# Altium PCB BlackPill.PcbDoc (part 1 of 2)
Units mm, origin at the board's own origin, x right, y up, seen from the top; angles counter-clockwise.
Board outline 35 x 50 mm, 4 copper layers (Top Layer, Mid Layer 1, Mid Layer 2, Bottom Layer), stack 1.586 mm thick; 44 components, 52 nets, 225 pads, 204 vias.
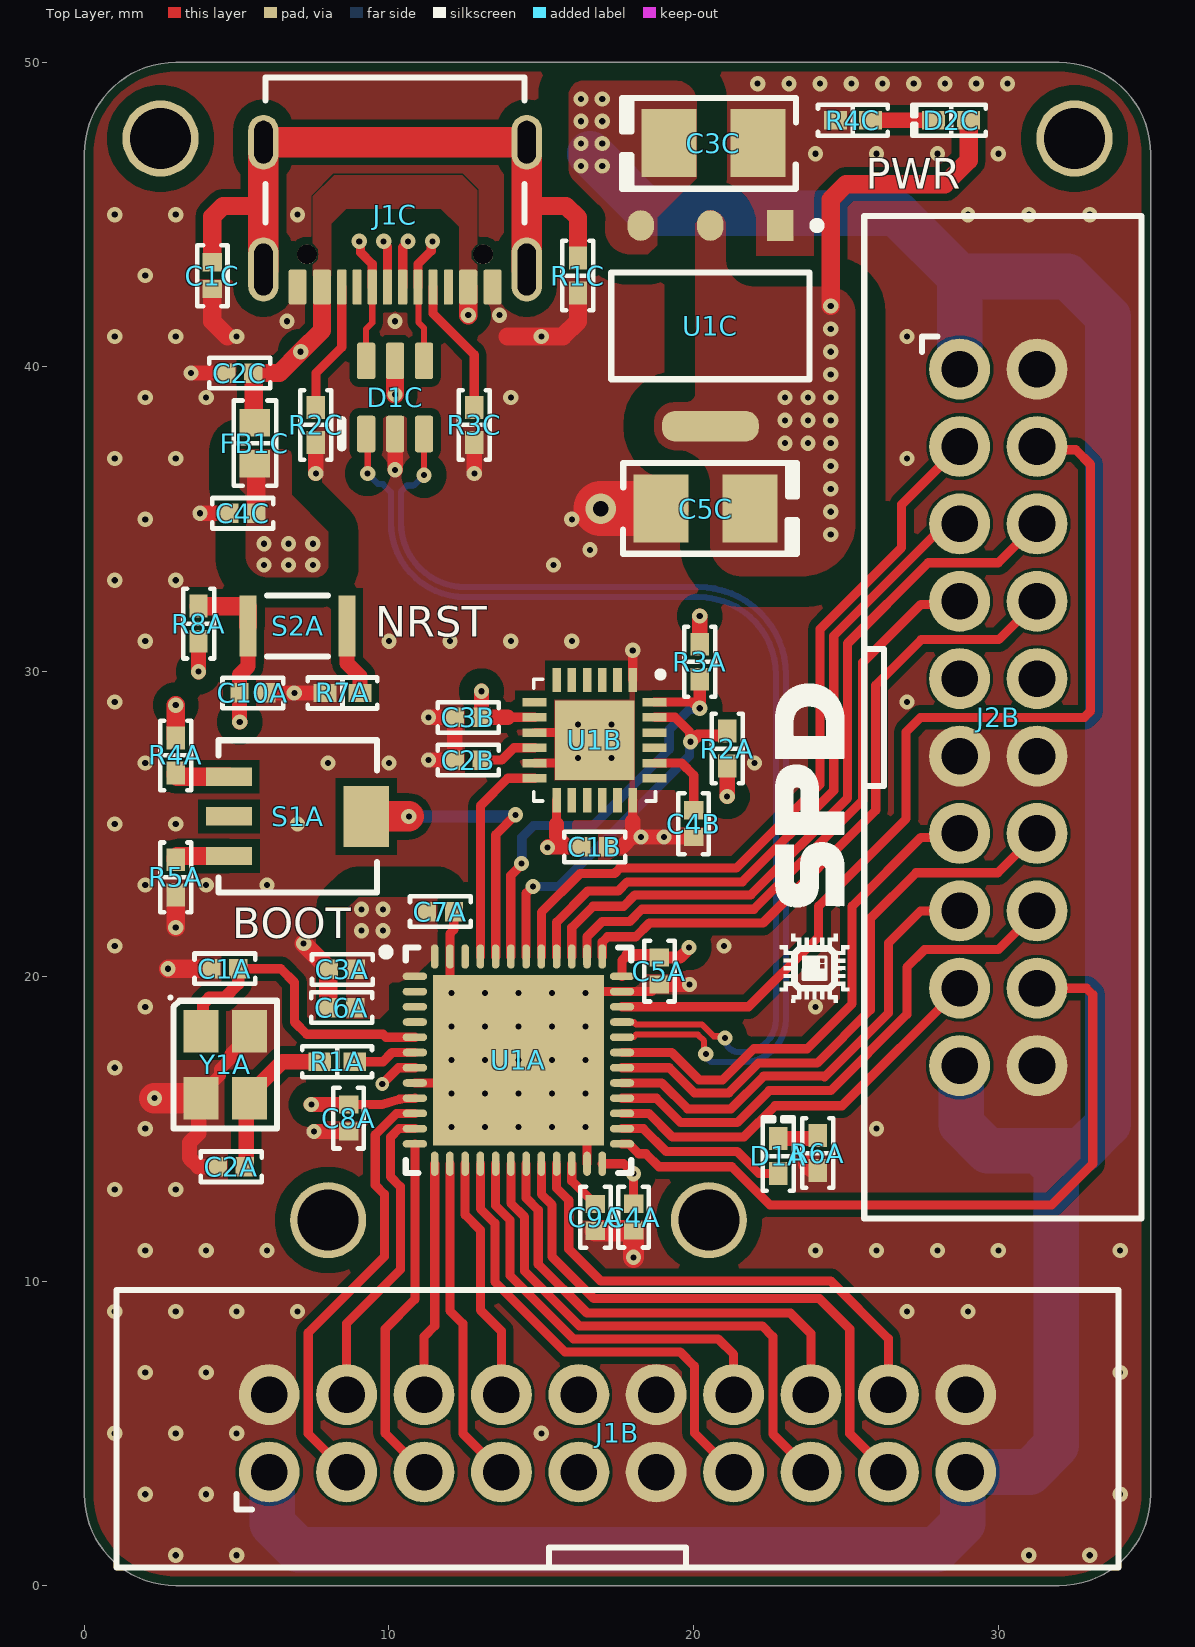
[diagram p0: Top Layer view]
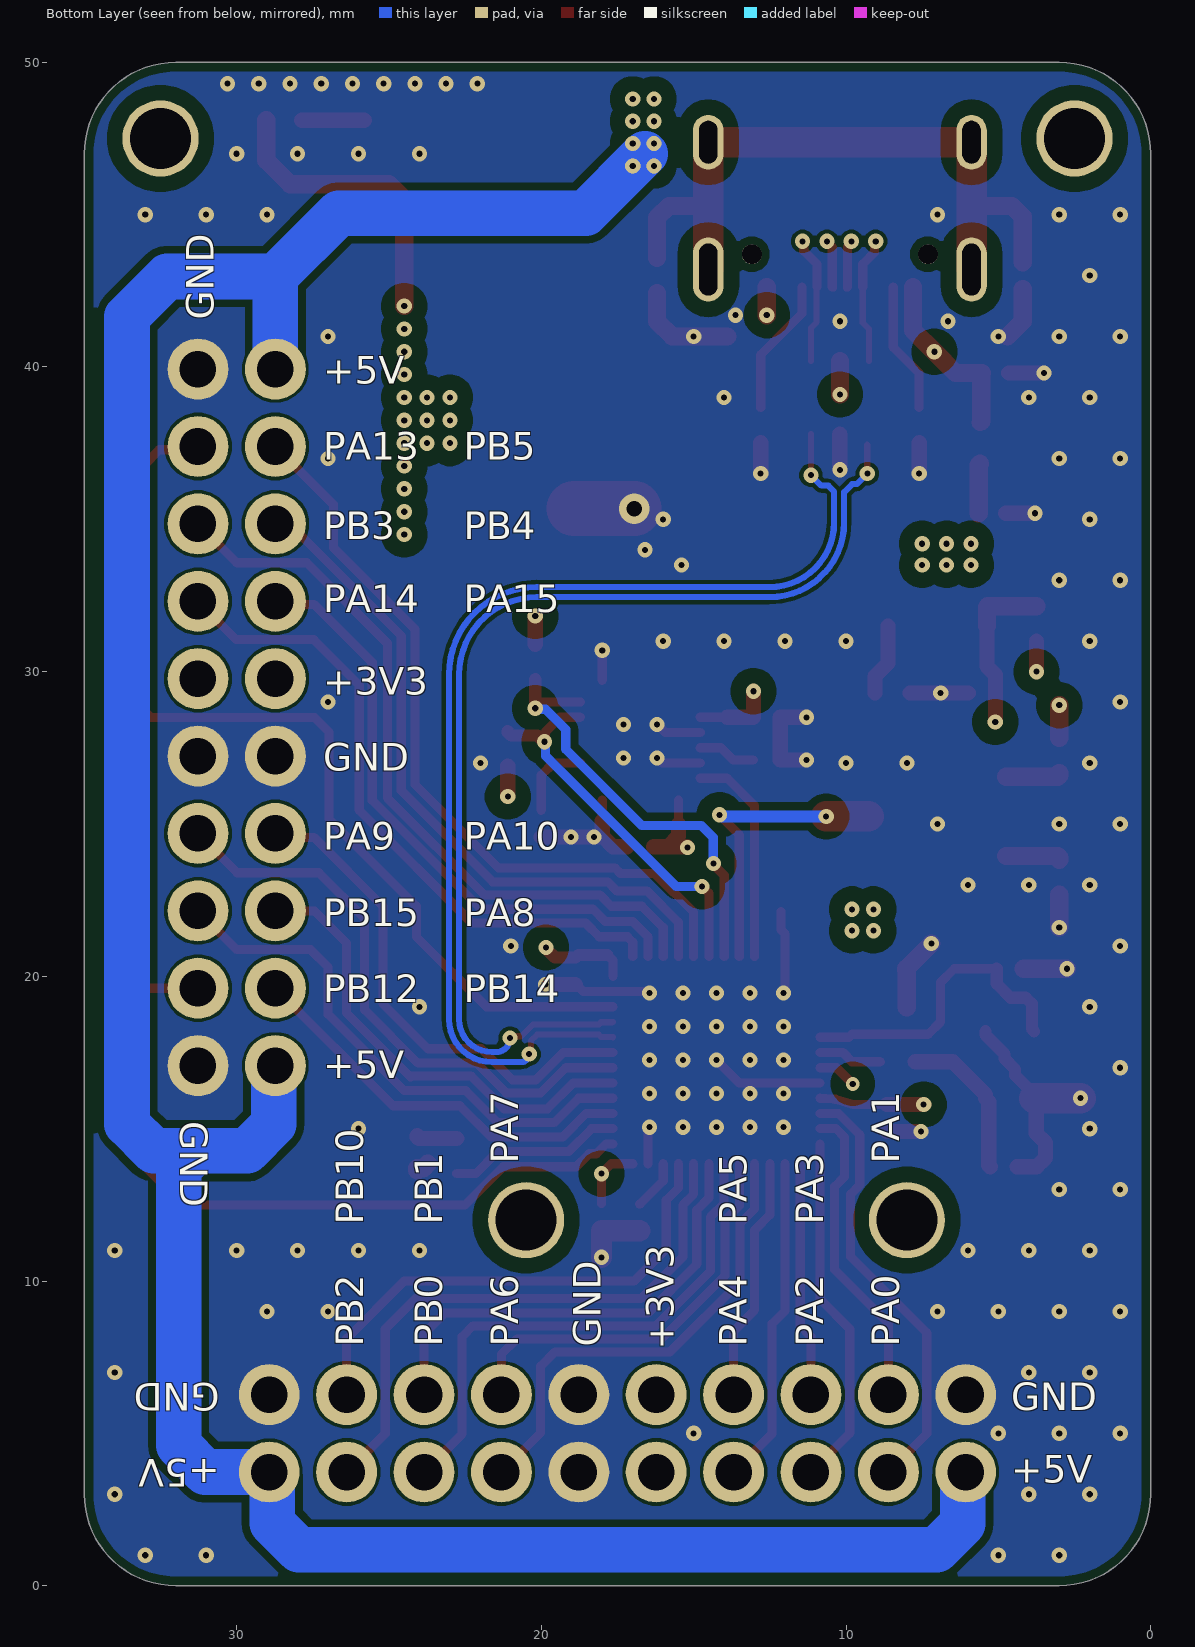
[diagram p1: Bottom Layer view, seen from below]
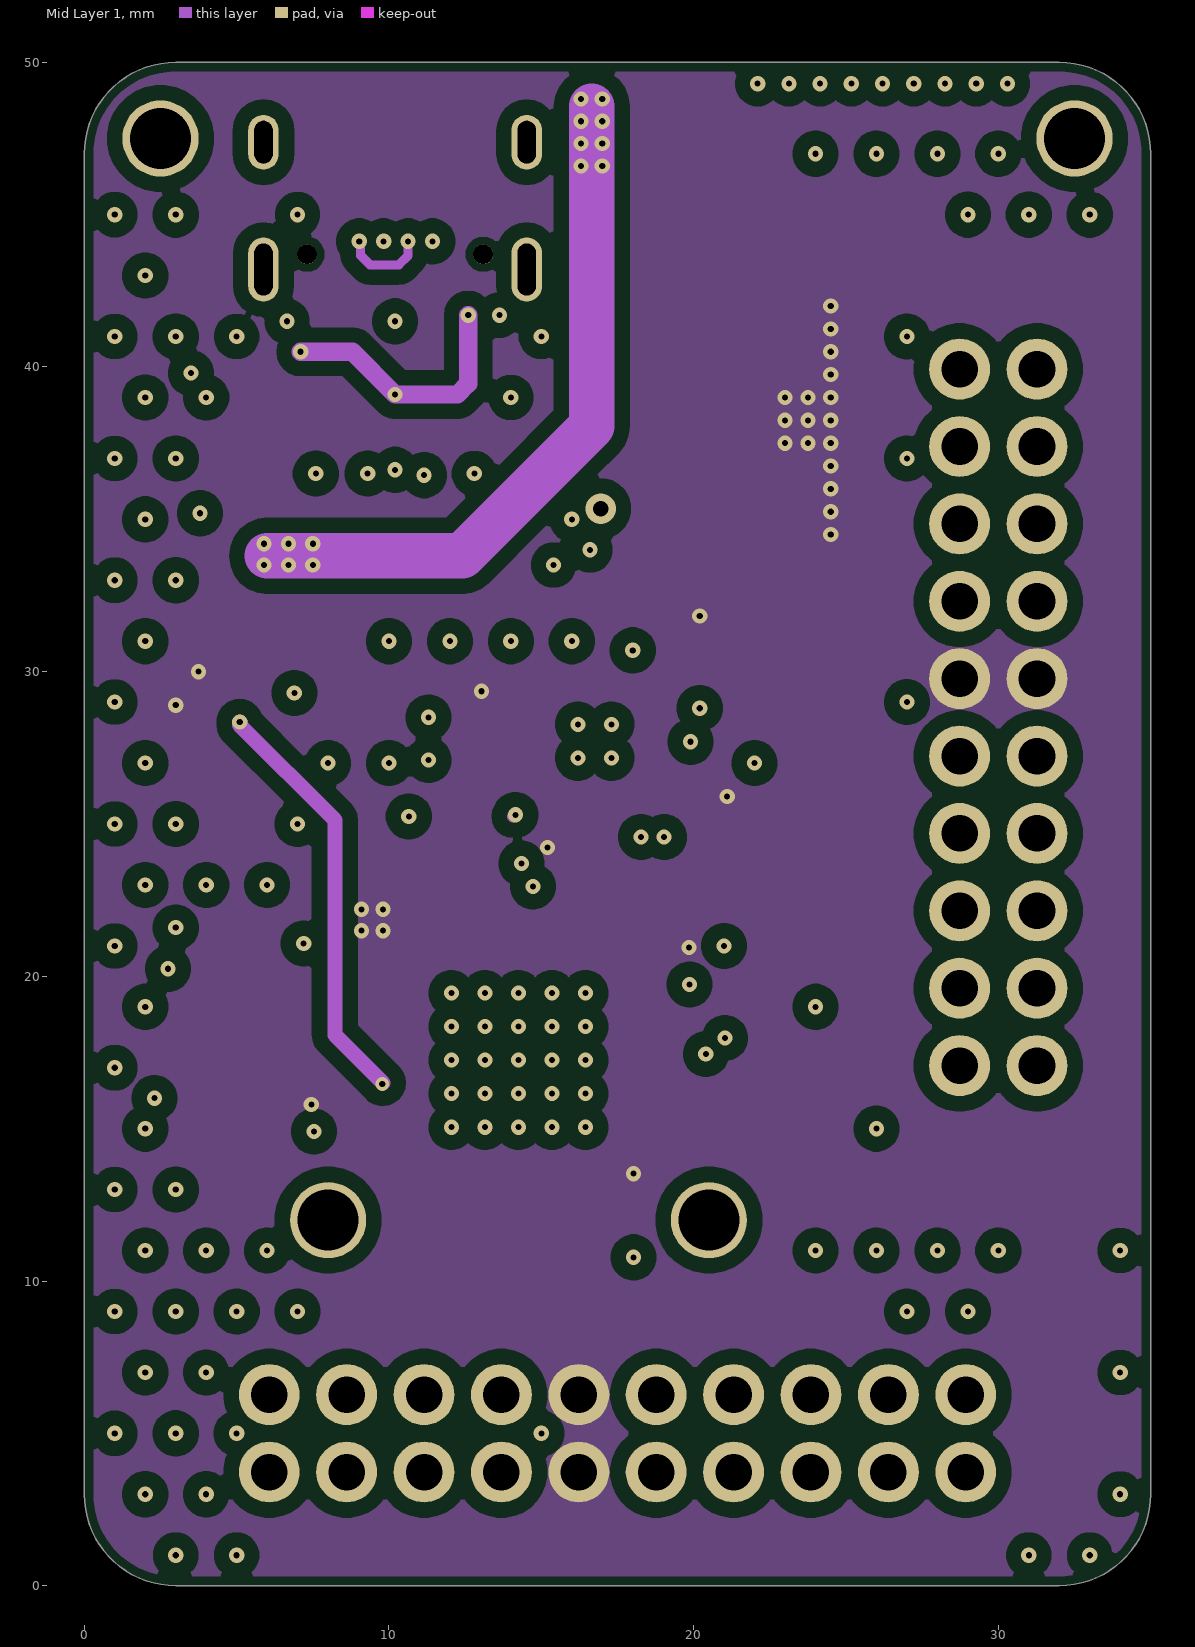
[diagram p2: Mid Layer 1]
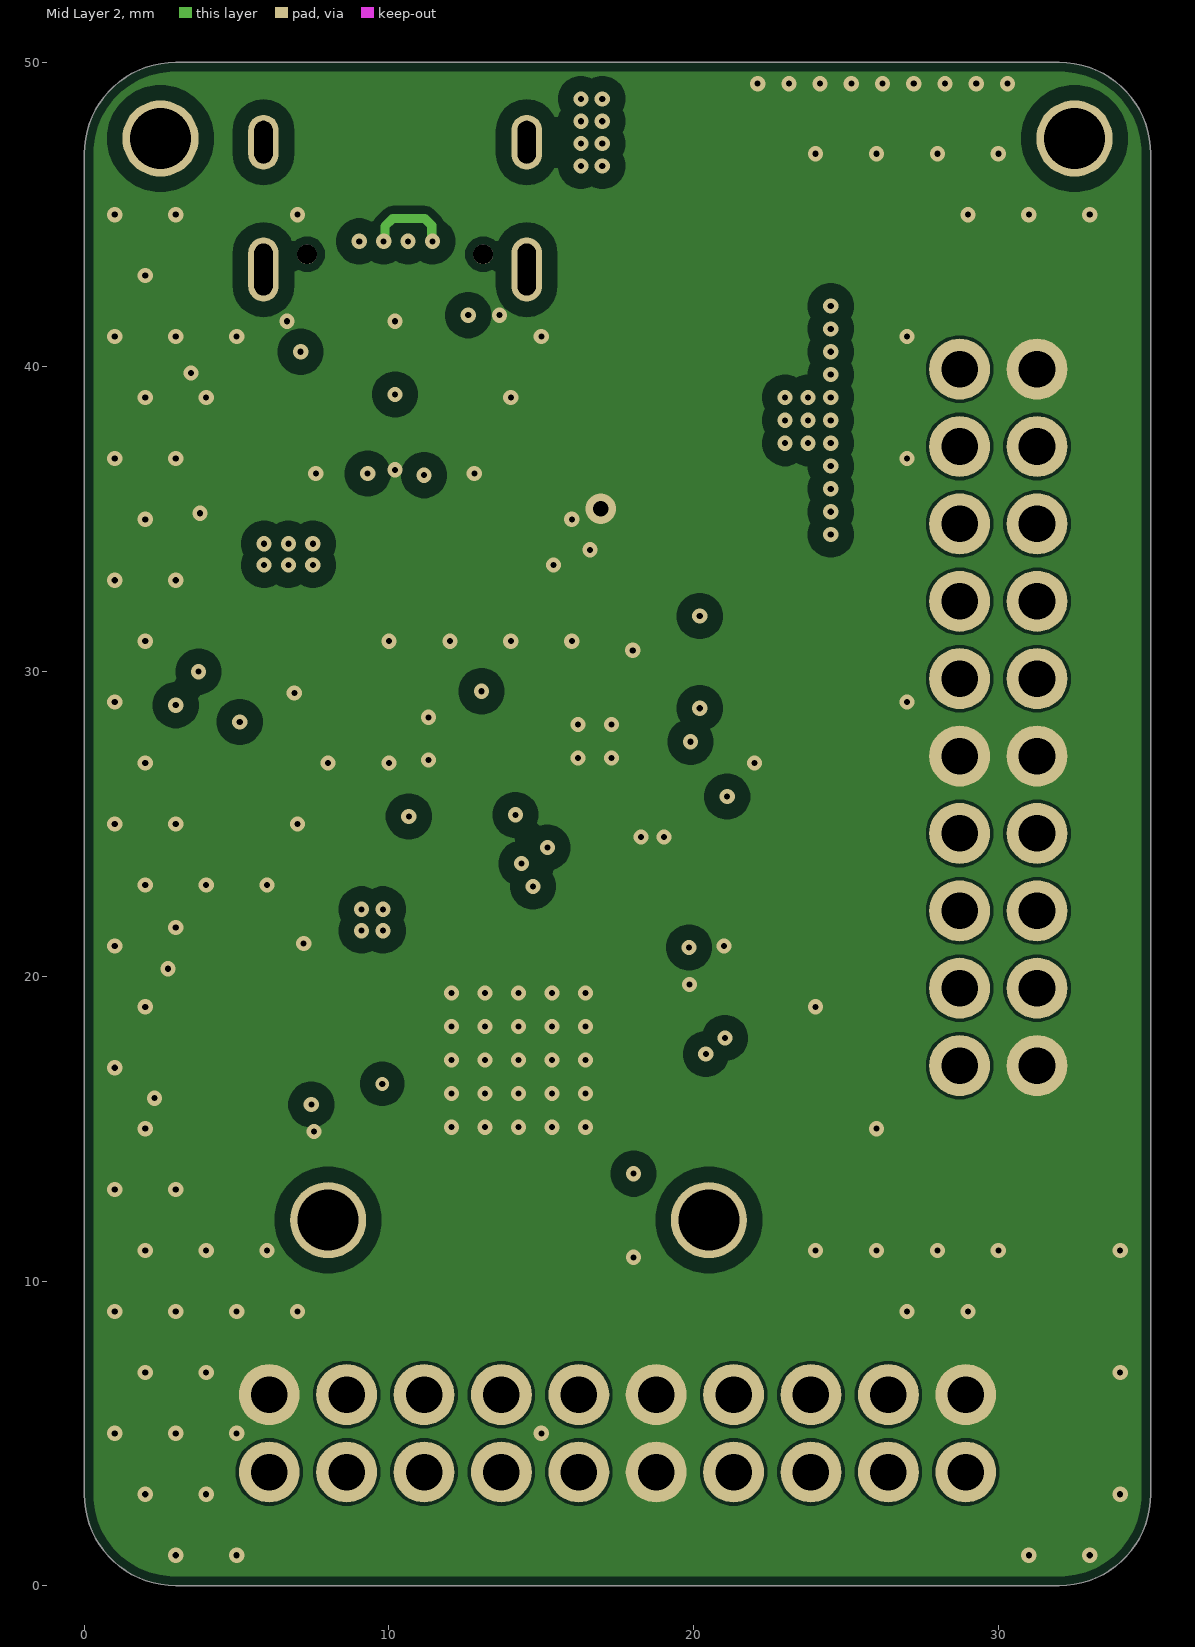
[diagram p3: Mid Layer 2]

## Layer stack, top to bottom
Top Solder: solder mask 0.0127, Solder Resist, Dk 3.8
Top Layer: signal copper 0.035
Dielectric 1: prepreg 0.2104, PP-023, Dk 4.4
Mid Layer 1: signal copper 0.0152
Core: core 1.065, FR-4, Dk 4.6
Mid Layer 2: signal copper 0.0152
Dielectric 2: prepreg 0.2104, PP-023, Dk 4.4
Bottom Layer: signal copper 0.035
Bottom Solder: solder mask 0.0127, Solder Resist, Dk 3.8

## Board outline
0,3 0,47 cw(c3,47) 3,50 32,50 cw(c32,47) 35,47 35,3 cw(c32,3) 32,0 3,0 cw(c3,3)

## Design rules (kind name [scope] priority, off if disabled: settings)
BoardOutlineClearance "TOP OVERLAY" [OnLayer('Top Overlay')] p1: gap=0 ignorepadtopadclearanceinfootprint=FALSE
BoardOutlineClearance [All] p2: gap=0.3 ignorepadtopadclearanceinfootprint=FALSE
Clearance "BOT GND" [OnLayer('Bottom Layer') vs InNetClass('USB')] p1: gap=0.102 ignorepadtopadclearanceinfootprint=TRUE except(0.127: Arc-Via Arc-Poly Track-Poly SMDPad-SMDPad SMDPad-THPad SMDPad-Via THPad-Via Via-Fill Via-Poly Via-Region Via-Text Fill-Poly; 0.2: Track-SMDPad Track-THPad; 0.254: Arc-Hole Track-Via Track-Hole SMDPad-Poly SMDPad-Hole THPad-THPad Via-Via Via-Hole Fill-Hole Poly-Hole Region-Hole Text-Hole; 0.5: THPad-Poly THPad-Hole; 1: Poly-Poly)
Clearance "MID 3V3" [InNamedPolygon('MID 3V3')] p2: gap=0.254 ignorepadtopadclearanceinfootprint=TRUE except(0.5: Arc-Poly Track-Poly SMDPad-Poly THPad-Poly Via-Poly Fill-Poly; 1: Poly-Poly)
Clearance JCON [InComponentClass('JCON')] p3: gap=0.102 ignorepadtopadclearanceinfootprint=TRUE except(0.1: Track-THPad Track-Via; 0.127: Arc-Via SMDPad-SMDPad SMDPad-THPad SMDPad-Via THPad-Via Via-Fill Via-Poly Via-Region Via-Text; 0.2: Track-SMDPad; 0.254: Arc-Hole Track-Hole SMDPad-Hole THPad-THPad Via-Via Via-Hole Fill-Hole Poly-Hole Region-Hole Text-Hole; 0.5: THPad-Hole)
Clearance VBUS [InNamedPolygon('VBUS')] p4: gap=0.05 ignorepadtopadclearanceinfootprint=FALSE
Clearance [All] p5: gap=0.102 ignorepadtopadclearanceinfootprint=TRUE except(0.127: Arc-Via SMDPad-SMDPad SMDPad-THPad SMDPad-Via THPad-Via Via-Fill Via-Region Via-Text; 0.2: Track-SMDPad Track-THPad; 0.254: Arc-Poly Arc-Hole Track-Via Track-Poly Track-Hole SMDPad-Poly SMDPad-Hole THPad-THPad Via-Via Via-Hole Fill-Poly Fill-Hole Poly-Hole Region-Hole Text-Hole; 0.5: THPad-Poly THPad-Hole Via-Poly; 1: Poly-Poly)
ComponentClearance [All] p1: gap=0.102 collisioncheckmode=3 verticalgap=0.102 showdistances=TRUE
DiffPairsRouting [All] p1: maxlimit=0.127 minlimit=0.127 mostfreqgap=0.127 toplayer_minwidth=0.202 toplayer_maxwidth=0.202 toplayer_prefwidth=0.202 midlayer1_minwidth=0.13 midlayer1_maxwidth=0.13 midlayer1_prefwidth=0.13 midlayer2_minwidth=0.13 midlayer2_maxwidth=0.13 midlayer2_prefwidth=0.13 bottomlayer_minwidth=0.202 bottomlayer_maxwidth=0.202 bottomlayer_prefwidth=0.202 impedanceprofiledriven=TRUE impedanceprofileid={9C5FF6D6-82D5-4CFE-BC6B-747FD98509A1} impedanceprofilevalue=90.000000 maxuncoupledlength=12.7
Height [All] p1: minheight=0 maxheight=1816.048 prefheight=12.7
HoleSize [All] p1: absolutevalues=TRUE maxlimit=6.3 minlimit=0.2 maxpercent=80.000 minpercent=20.000
HoleSize PadHoleSize [IsPad] p2: absolutevalues=TRUE maxlimit=6.3 minlimit=0.5 maxpercent=80.000 minpercent=20.000
HoleSize ViaHoleSize [IsVia] p3: absolutevalues=TRUE maxlimit=6.3 minlimit=0.2 maxpercent=80.000 minpercent=20.000
HoleToHoleClearance [All] p1: gap=0.254 allowstackedmicrovias=FALSE
MinimumAnnularRing [All] p1: minimumring=0.12
MinimumSolderMaskSliver MinimumSolderMaskSliver_1 [HasFootprint('USB4105-GF-A-060') vs HasFootprint('USB4105-GF-A-060')] p1: minsoldermaskwidth=0.001
MinimumSolderMaskSliver [All] p2: minsoldermaskwidth=0.09
PlaneClearance [All] p1: clearance=0.102
PlaneConnect PlaneConnectPowerPads [InPadClass('PowerPads')] p1: planeconnectstyle=Direct reliefexpansion=0.508 reliefentries=4 reliefconductorwidth=0.254 reliefairgap=0.254
PlaneConnect [All] p2: pad.planeconnectstyle=Relief pad.reliefexpansion=0.3 pad.reliefentries=4 pad.reliefconductorwidth=0.102 pad.reliefairgap=0.102 via.planeconnectstyle=Direct via.reliefexpansion=0.3 via.reliefentries=4 via.reliefconductorwidth=0.127 via.reliefairgap=0.127
PolygonConnect PolygonConnectPowerPads [All vs (InPadClass('PowerPads'))] p1: connectstyle=Direct reliefconductorwidth=0.254 reliefentries=4 polygonreliefangle="90 Angle" airgapwidth=0.254
PolygonConnect [All] p2: connectstyle=Direct reliefconductorwidth=0.102 reliefentries=4 polygonreliefangle="45 Angle" airgapwidth=0.102
RoutingVias [All] p1: holewidth=0.2 width=0.5 viastyle="Through Hole" minholewidth=0.2 minwidth=0.45 maxholewidth=6.3 maxwidth=6.55
SilkToSilkClearance [All] p1: silktosilkclearance=0.127
SilkToSolderMaskClearance [IsPad] p1: minsilkscreentomaskgap=0.1 clearancetoexposedcopper=TRUE
SolderMaskExpansion [All] p1: expansion=0.051 istentingtop=FALSE
SupplyNets "Schematic Supply Nets_4" [InNet('GNDS')] p1: voltage=0.000
SupplyNets "Schematic Supply Nets_3" [InNet('+3V3')] p2: voltage=0.000
SupplyNets "Schematic Supply Nets_2" [InNet('GND')] p3: voltage=0.000
SupplyNets "Schematic Supply Nets_1" [InNet('VBUS')] p4: voltage=0.000
SupplyNets "Schematic Supply Nets" [InNet('+5V')] p5: voltage=0.000
UnRoutedNet [All] p1: checkbadconnections=TRUE
Width Power_12mil [All] p1: maxlimit=25.4 minlimit=0.3 preferedwidth=0.305 minimp=50.000000 maximp=50.000000 favimp=50.000000
Width Power_20mil [All] p2: maxlimit=25.4 minlimit=0.508 preferedwidth=0.508 minimp=50.000000 maximp=50.000000 favimp=50.000000
Width Width_4mil [All] p3: maxlimit=25.4 minlimit=0.102 preferedwidth=0.102 minimp=50.000000 maximp=50.000000 favimp=50.000000
Width Width_6mil [All] p4: maxlimit=25.4 minlimit=0.152 preferedwidth=0.152 minimp=50.000000 maximp=50.000000 favimp=50.000000
Width Width_10mil [All] p5: maxlimit=25.4 minlimit=0.254 preferedwidth=0.254 minimp=50.000000 maximp=50.000000 favimp=50.000000
19 further rules are at their usual default settings.

## Classes and differential pairs
component class JCON: J1B J2B
net class PWR: +3V3 +5V VBUS
net class USB: TVS_D_N TVS_D_P USB_D_N USB_D_P
net class MCU_PB[15..0]: MCU_PB0 MCU_PB1 MCU_PB2 MCU_PB3 MCU_PB4 MCU_PB5 MCU_PB10 MCU_PB12 MCU_PB14 MCU_PB15
net class MCU_PA[15..0]: MCU_PA0 MCU_PA1 MCU_PA2 MCU_PA3 MCU_PA4 MCU_PA5 MCU_PA6 MCU_PA7 MCU_PA8 MCU_PA9 MCU_PA10 MCU_PA13 MCU_PA14 MCU_PA15
component class U_Power: C1C C2C C3C C4C C5C D1C D2C FB1C J1C R1C R2C R3C R4C U1C
component class "U_IMU & Connectors": C1B C2B C3B C4B J1B J2B U1B
component class "IC BASE": C1A C2A C3A C4A C5A C6A C7A C8A C9A C10A D1A R1A R2A R3A R4A R5A R6A R7A R8A S1A S2A U1A Y1A
differential pair TVS_D: +TVS_D_P -TVS_D_N
differential pair USB_D: +USB_D_P -USB_D_N

## Components (designator, comment, footprint, x,y, rotation, side; value= is the part's Value field where it differs from the comment)
C1A "20pF" "CAP 0402_1005" 4.615,20.25 r0 top
C1B "0.1 µF" "CAP 0402_1005" 16.75,24.25 r180 top
C1C "4700 pF" "CAP 0402_1005" 4.2,43 r270 top
C2A "20pF" "CAP 0402_1005" 4.825,13.75 r0 top
C2B "0.1 µF" "CAP 0402_1005" 12.6,27.1 r0 top
C2C "2.2µF" "CAP 0402_1005" 5.1,39.8 r0 top
C3A "4.7 µF" "CAP 0402_1005" 8.473,20.227 r0 top
C3B "10000 pF" "CAP 0402_1005" 12.6,28.5 r0 top
C3C "22µF" "CAP POL 1411_3528" 20.65,47.35 r0 top
C4A "0.1 µF" "CAP 0402_1005" 18.027,12.1 r90 top
C4B "2.2µF" "CAP 0402_1005" 20,25.01 r90 top
C4C "2.2µF" "CAP 0402_1005" 5.2,35.2 r0 top
C5A "0.1 µF" "CAP 0402_1005" 18.875,20.175 r90 top
C5C "22µF" "CAP POL 1411_3528" 20.39,35.35 r180 top
C6A "0.1 µF" "CAP 0402_1005" 8.45,18.975 r0 top
C7A "0.1 µF" "CAP 0402_1005" 11.69,22.125 r180 top
C8A "0.1 µF" "CAP 0402_1005" 8.675,15.35 r90 top
C9A "4.7 µF" "CAP 0402_1005" 16.775,12.09 r90 top
C10A "0.1 µF" "CAP 0402_1005" 5.535,29.3 r180 top
D1A "Green" "LED 0402_1005 GREEN" 22.775,14.1 r90 top
D1C "USBLC6-2SC6" SOT-23-6 10.2,39 r0 top
D2C "Yellow" "LED 0402_1005 YELLOW" 28.45,48.102 r180 top
FB1C "120 Ohms @ 100 MHz" "FER 0603_1608" 5.6,37.5 r270 top
J1B "SBH11-NBPC-D10-ST-BK" "SULLINS SBH11-NBPC-D10-ST-BK" 17.5,5 r90 top locked
J1C "USB4105-GF-A-060" USB4105-GF-A-060 10.2,45 r180 top locked
J2B "SBH11-NBPC-D10-ST-BK" "SULLINS SBH11-NBPC-D10-ST-BK" 30,28.5 r0 top locked
R1A "0 Ohms" "RES 0402_1005" 8.3,17.2 r0 top
R1C "1 MOhms" "RES 0402_1005" 16.2,43 r270 top
R2A "4.7 kOhms" "RES 0402_1005" 21.1,27.475 r270 top
R2C "5.1 kOhms" "RES 0402_1005" 7.598,38.1 r90 top
R3A "4.7 kOhms" "RES 0402_1005" 20.2,30.325 r90 top
R3C "5.1 kOhms" "RES 0402_1005" 12.8,38.1 r90 top
R4A "10 kOhms" "RES 0402_1005" 3,27.25 r90 top
R4C "1 kOhms" "RES 0402_1005" 25.225,48.102 r0 top
R5A "10 kOhms" "RES 0402_1005" 3,23.25 r90 top
R6A "1 kOhms" "RES 0402_1005" 24.075,14.2 r90 top
R7A "1 kOhms" "RES 0402_1005" 8.475,29.3 r0 top
R8A "10 kOhms" "RES 0402_1005" 3.75,31.575 r90 top
S1A "CS-4-13NTA" "NIDEC COPAL CS-4-13NTA" 7,25.25 r270 top
S2A "EVP-AWED4A" "PANASONIC EVPAW" 7,31.5 r0 top
U1A "STM32F411CEU6" STM-UFQFPN48_L 14.25,17.25 r0 top
U1B "MPU-6050" QFN50P400X400X95-24N 16.75,27.75 r270 top locked
U1C "AMS1117-3.3" FP-AMS1117-IPC_C 20.548,41.35 r270 top
Y1A "24 MHz" "EPSON TSX-3225" 4.625,17.1 r270 top

## Footprints (in the part's own frame and the unit in brackets; to place one, negate y for a bottom-side part, rotate by r counter-clockwise, add the part's x,y. Pads: shape width x height; smd on the part's side, far side on the other; paste and mask are expansions set on the pad)
"CAP 0402_1005" [mm] "Chip Capacitor, 2-Leads, Body 1.02x0.51mm, IPC Medium Density"
  rect 0.6x0.64 smd: 1(-0.44,0) 2(0.44,0)
  silkscreen extent -1,-0.5 1,0.5, body extent -0.5,-0.26 0.5,0.26, height 0.52
"CAP POL 1411_3528" [mm] "Molded Capacitor, 2-Leads, Body 3.50x2.80mm, IPC Medium Density"
  rect 1.8x2.23 smd: 1(-1.46,0) 2(1.46,0)
  silkscreen extent -3,-1.5 2.71,1.48, body extent -1.87,-1.45 1.86,1.45, height 2
"EPSON TSX-3225" [mm] "Crystal, 4-Leads, Body 2.50x3.20mm, Pitch 2.20mm, IPC Medium Density"
  rect 1.4x1.15 smd: 1(-1.1,-0.8) 2(1.1,-0.8) 3(1.1,0.8) 4(-1.1,0.8)
  silkscreen extent -2.25,-1.85 2.1,1.7, body extent -1.61,-1.26 1.61,1.26, height 0.6
"FER 0603_1608" [mm] "Chip Ferrite, 2-Leads, Body 1.60x0.80mm, IPC Medium Density"
  rect 0.9x1 smd: 1(-0.675,0) 2(0.675,0)
  silkscreen extent -1.4,-0.7 1.4,0.7, body extent -0.8,-0.41 0.8,0.41, height 0.82
FP-AMS1117-IPC_C [mm]
  rect 1.004x0.872 smd paste+0 mask+0: 1(-3.295,2.29)
  rrect100% 1.004x0.872 smd paste+0 mask+0: 2(-3.295,0) 3(-3.295,-2.29)
  rrect87% 1.004x3.182 smd paste+0 mask+0: 4(3.295,0)
  silkscreen extent -3.42,-3.25 1.75,3.63, body extent -3.9,-3.35 3.9,3.35, height 0.25
"LED 0402_1005 GREEN" [mm] "Chip Diode, 2-Leads, Body 1.00x0.50mm, IPC Medium Density"
  rect 0.75x0.6 smd: 1(-0.575,0) 2(0.575,0)
  silkscreen extent -1.14,-0.51 1.27,0.51, body extent -0.5,-0.25 0.5,0.25, height 0.21
"LED 0402_1005 YELLOW" [mm] "Chip Diode, 2-Leads, Body 1.00x0.50mm, IPC Medium Density"
  rect 0.75x0.6 smd: 1(-0.575,0) 2(0.575,0)
  silkscreen extent -1.14,-0.51 1.27,0.51, body extent -0.5,-0.25 0.5,0.25, height 0.21
"NIDEC COPAL CS-4-13NTA" [mm]
  rect 0.6x1.5 smd: 1(-1.3,-2.25) 2(0,-2.25) 3(1.3,-2.25)
  rect 2x1.5 smd: C(0,2.25)
  silkscreen extent -2.5,-2.6 2.5,2.6, body extent -2.5,-2.6 2.5,2.6, height 2.32
"PANASONIC EVPAW" [mm]
  rect 0.55x2 smd: 1(-1.625,0) 2(1.625,0)
  silkscreen extent -1,-1 1,1, body extent -1.75,-1 1.75,1, height 0.58
QFN50P400X400X95-24N [mm]
  rect 0.79x0.28 smd: 1(-1.97,1.25) 2(-1.97,0.75) 3(-1.97,0.25) 4(-1.97,-0.25) 5(-1.97,-0.75) 6(-1.97,-1.25) 13(1.97,-1.25) 14(1.97,-0.75) 15(1.97,-0.25) 16(1.97,0.25) 17(1.97,0.75) 18(1.97,1.25)
  rect 0.28x0.79 smd: 7(-1.25,-1.97) 8(-0.75,-1.97) 9(-0.25,-1.97) 10(0.25,-1.97) 11(0.75,-1.97) 12(1.25,-1.97) 19(1.25,1.97) 20(0.75,1.97) 21(0.25,1.97) 22(-0.25,1.97) 23(-0.75,1.97) 24(-1.25,1.97)
  rect 2.6x2.6 smd: 25(0,0)
  silkscreen extent -2.26,-2 2,2.26, body extent -2,-2 2,2, height 0.93
"RES 0402_1005" [mm] "Chip Resistor, 2-Leads, Body 1.0x0.5mm, IPC Medium Density"
  rect 0.75x0.6 smd: 1(-0.575,0) 2(0.575,0)
  silkscreen extent -1.14,-0.51 1.14,0.51, body extent -0.5,-0.25 0.5,0.25, height 0.35
SOT-23-6 [mm]
  rrect25% 0.6x1.2 smd: 1(-0.95,-1.2) 2(0,-1.2) 3(0.95,-1.2) 4(0.95,1.2) 5(0,1.2) 6(-0.95,1.2)
  silkscreen extent -1.75,-1.63 -1.75,-0.76, body extent -1.45,-1.4 1.45,1.4, height 1.45
STM-UFQFPN48_L [mm] "QFN, 48-Leads, Body 7.1x7.1mm, Pitch 0.5mm, Thermal Pad 5.6x5.6mm, IPC High Density"
  oval 0.8x0.25 smd: 1(-3.4,2.75) 2(-3.4,2.25) 3(-3.4,1.75) 4(-3.4,1.25) 5(-3.4,0.75) 6(-3.4,0.25) 7(-3.4,-0.25) 8(-3.4,-0.75) 9(-3.4,-1.25) 10(-3.4,-1.75) 11(-3.4,-2.25) 12(-3.4,-2.75) 25(3.4,-2.75) 26(3.4,-2.25) 27(3.4,-1.75) 28(3.4,-1.25) 29(3.4,-0.75) 30(3.4,-0.25) 31(3.4,0.25) 32(3.4,0.75) 33(3.4,1.25) 34(3.4,1.75) 35(3.4,2.25) 36(3.4,2.75)
  oval 0.25x0.8 smd: 13(-2.75,-3.4) 14(-2.25,-3.4) 15(-1.75,-3.4) 16(-1.25,-3.4) 17(-0.75,-3.4) 18(-0.25,-3.4) 19(0.25,-3.4) 20(0.75,-3.4) 21(1.25,-3.4) 22(1.75,-3.4) 23(2.25,-3.4) 24(2.75,-3.4) 37(2.75,3.4) 38(2.25,3.4) 39(1.75,3.4) 40(1.25,3.4) 41(0.75,3.4) 42(0.25,3.4) 43(-0.25,3.4) 44(-0.75,3.4) 45(-1.25,3.4) 46(-1.75,3.4) 47(-2.25,3.4) 48(-2.75,3.4)
  rect 5.6x5.6 smd: 49(0,0)
  silkscreen extent -4.47,-3.7 3.7,3.7, body extent -3.55,-3.55 3.55,3.55, height 0.6
"SULLINS SBH11-NBPC-D10-ST-BK" [mm]
  round 2 hole 1.2: 1(-1.27,11.43) 2(-1.27,8.89) 3(-1.27,6.35) 4(-1.27,3.81) 5(-1.27,1.27) 6(-1.27,-1.27) 7(-1.27,-3.81) 8(-1.27,-6.35) 9(-1.27,-8.89) 10(-1.27,-11.43) 11(1.27,-11.43) 12(1.27,-8.89) 13(1.27,-6.35) 14(1.27,-3.81) 15(1.27,-1.27) 16(1.27,1.27) 17(1.27,3.81) 18(1.27,6.35) 19(1.27,8.89) 20(1.27,11.43)
  silkscreen extent -4.4,-16.45 4.7,16.45, body extent -4.4,-16.45 4.7,16.45, height 9.1
USB4105-GF-A-060 [mm]
  rrect25% 0.6x1.15 smd mask+0.05: A1B12(-3.2,2.378) A4B9(-2.4,2.378) B1A12(3.2,2.378) B4A9(2.4,2.378)
  rrect25% 0.3x1.15 smd mask+0.05: A5(-1.25,2.378) A6(-0.25,2.378) A7(0.25,2.378) A8(1.25,2.378) B5(1.75,2.378) B6(0.75,2.378) B7(-0.75,2.378) B8(-1.75,2.378)
  round 0.65 hole 0.65 unplated mask+0.05: MH(-2.89,1.303) MH(2.89,1.303)
  oval 1x1.8 hole 0.6 slot 1.4 at 90 deg: SH(-4.32,-2.377) SH(4.32,-2.377)
  oval 1x2.1 hole 0.6 slot 1.7 at 90 deg: SH(-4.32,1.803) SH(4.32,1.803)
  silkscreen extent -4.25,-4.5 4.25,0.25, body extent -4.47,-4.97 4.47,2.73, height 3.27

## Part data
C1A C2A: library part 04023U200JAT2A, "CAP CER 20PF 25V NP0 0402", Device Package="0402 (1005 Metric)", Manufacturer="AVX Corporation", Operating Temperature="-55°C ~ 125°C", Supplier Part Number 1=478-11758-1-ND, Temperature Coefficient="C0G, NP0", Tolerance=±5%, Voltage - Rated=25V, Applications="RF, Microwave, High Frequency", Capacitance=20pF, ComponentLink1Description=Datasheet, ComponentLink1URL=http://datasheets.avx.com/U-Series.pdf, ComponentLink2Description="DigiKey Link", ComponentLink2URL=http://digikey.com/product-detail/en/avx-corporation/04023U200JAT2A/478-11758-1-ND/8573394, Features="Ultra Low ESR", id=68, LastUpdated=2022-02-08T12:26:58.317, Lifecycle Status=Active, Minimum Order=1, Mounting Type="Surface Mount, MLCC", Package / Case="0402 (1005 Metric)", Packaging=TapeAndReel, Part Number=04023U200JAT2A, Part Status=Active, PartId=1805, Price=0.02, Series=U, Size / Dimension="0.039\" L x 0.020\" W (1.00mm x 0.50mm)", Supplier 1=DigiKey, Thickness (Max)="0.022\" (0.55mm)"
C1B C2B C4A C5A C6A C7A C8A C10A: library part CL05B104KP5VPNC, "CAP CER 100NF 10V X7R 0402", Device Package="0402 (1005 Metric)", Manufacturer="Samsung Electro-Mechanics", Operating Temperature="-55°C ~ 125°C", Ratings=AEC-Q200, Supplier Part Number 1=1276-CL05B104KP5VPNCCT-ND, Temperature Coefficient=X7R, Tolerance=±10%, Voltage - Rated=10V, Applications=Automotive, Capacitance="0.1 µF", ComponentLink1Description=Datasheet, ComponentLink1URL=https://mm.digikey.com/Volume0/opasdata/d220001/medias/docus/5458/CL05B104KP5VPNC_Spec.pdf, ComponentLink2Description="DigiKey Link", ComponentLink2URL=https://www.digikey.com/en/products/detail/samsung-electro-mechanics/CL05B104KP5VPNC/20498482, id=7736, LastUpdated=2023-11-05T20:02:55.743, Lifecycle Status=Active, Minimum Order=1, Mounting Type="Surface Mount, MLCC", Package / Case="0402 (1005 Metric)", Packaging=TapeAndReel, Part Number=CL05B104KP5VPNC, PartId=56690, Price=0.01, Series=CL, Size / Dimension="0.039\" L x 0.020\" W (1.00mm x 0.50mm)", Supplier 1=DigiKey, Thickness (Max)="0.022\" (0.55mm)"
C1C: library part C0402C472K4RECAUTO, "CAP CER 0402 4.7NF 16V X7R 10%", Device Package="0402 (1005 Metric)", Manufacturer=KEMET, Operating Temperature="-55°C ~ 125°C", Ratings=AEC-Q200, Supplier Part Number 1=399-17875-1-ND, Temperature Coefficient=X7R, Tolerance=±10%, Voltage - Rated=16V, Applications="Automotive, ESD Protection", Capacitance="4700 pF", ComponentLink1Description=Datasheet, ComponentLink1URL=https://api.kemet.com/component-edge/download/datasheet/C0402C472K4RECAUTO.pdf, ComponentLink2Description="DigiKey Link", ComponentLink2URL=https://www.digikey.com/en/products/detail/kemet/C0402C472K4RECAUTO/8640469, id=3032, LastUpdated=2023-01-03T20:03:46.940, Lifecycle Status=Active, Minimum Order=1, Mounting Type="Surface Mount, MLCC", Package / Case="0402 (1005 Metric)", Packaging=TapeAndReel, Part Number=C0402C472K4RECAUTO, Part Status=Active, PartId=12122, Price=0.01, Series="ESD SMD Auto X7R", Size / Dimension="0.039\" L x 0.020\" W (1.00mm x 0.50mm)", Supplier 1=DigiKey, Thickness (Max)="0.022\" (0.55mm)"
C2C C4B C4C: library part 0402ZD225KAT2A, "CAP CER 2.2UF 10V X5R 0402", Device Package="0402 (1005 Metric)", Manufacturer="AVX Corporation", Operating Temperature="-55°C ~ 85°C", Supplier Part Number 1=478-10072-1-ND, Temperature Coefficient=X5R, Tolerance=±10%, Voltage - Rated=10V, Applications="General Purpose", Capacitance=2.2µF, ComponentLink1Description=Datasheet, ComponentLink1URL=http://datasheets.avx.com/cx5r.pdf, ComponentLink2Description="DigiKey Link", ComponentLink2URL=http://digikey.com/product-detail/en/avx-corporation/0402ZD225KAT2A/478-10072-1-ND/6564294, id=2335, LastUpdated=2022-02-08T12:26:45.707, Lifecycle Status=Active, Minimum Order=1, Mounting Type="Surface Mount, MLCC", Package / Case="0402 (1005 Metric)", Packaging=TapeAndReel, Part Number=0402ZD225KAT2A, Part Status=Active, PartId=9346, Price=0.09, Series=-, Size / Dimension="0.039\" L x 0.020\" W (1.00mm x 0.50mm)", Supplier 1=DigiKey, Thickness (Max)="0.022\" (0.56mm)"
C3A C9A: library part GMC04X5R475K10NT, "CAP0402 X5R 4.7UF 10% 10V", Device Package="0402 (1005 Metric)", Manufacturer="Cal-Chip Electronics, Inc.", Operating Temperature="-55°C ~ 85°C", Supplier Part Number 1=4713-GMC04X5R475K10NTCT-ND, Temperature Coefficient=X5R, Tolerance=±10%, Voltage - Rated=10V, Applications="General Purpose", Capacitance="4.7 µF", ComponentLink1Description=Datasheet, ComponentLink1URL=https://88ce57.p3cdn1.secureserver.net/wp-content/uploads/2023/01/gmc_series-2.pdf, ComponentLink2Description="DigiKey Link", ComponentLink2URL=https://www.digikey.com/en/products/detail/cal-chip-electronics-inc/GMC04X5R475K10NT/18151135, id=6422, LastUpdated=2023-04-21T19:03:30.743, Lifecycle Status=Active, Minimum Order=1, Mounting Type="Surface Mount, MLCC", Package / Case="0402 (1005 Metric)", Packaging=TapeAndReel, Part Number=GMC04X5R475K10NT, Part Status=Active, PartId=49814, Price=0.01, Series=GMC, Size / Dimension="0.039\" L x 0.020\" W (1.00mm x 0.50mm)", Supplier 1=DigiKey, Thickness (Max)="0.028\" (0.70mm)"
C3B: library part C0402C103K4REC7411, "CAP CER 0402 10NF 16V X7R 10%", Device Package="0402 (1005 Metric)", Manufacturer=KEMET, Operating Temperature="-55°C ~ 125°C", Supplier Part Number 1=399-C0402C103K4REC7411CT-ND, Temperature Coefficient=X7R, Tolerance=±10%, Voltage - Rated=16V, Applications="ESD Protection", Capacitance="10000 pF", ComponentLink1Description=Datasheet, ComponentLink1URL=https://connect.kemet.com:7667/gateway/IntelliData-ComponentDocumentation/1.0/download/datasheet/C0402C103K4REC7411, ComponentLink2Description="DigiKey Link", ComponentLink2URL=https://www.digikey.com/en/products/detail/kemet/C0402C103K4REC7411/8645017, id=7587, LastUpdated=2023-08-20T19:02:59.890, Lifecycle Status=Active, Minimum Order=1, Mounting Type="Surface Mount, MLCC", Package / Case="0402 (1005 Metric)", Packaging=TapeAndReel, Part Number=C0402C103K4REC7411, PartId=56100, Price=0.01, Series="ESD SMD Comm X7R", Size / Dimension="0.039\" L x 0.020\" W (1.00mm x 0.50mm)", Supplier 1=DigiKey, Thickness (Max)="0.022\" (0.55mm)"
C3C C5C: library part T540B226K010CH86107610, "CAP TANT POLY 22UF 10V 1411", Esr (Equivalent Series Resistance)="80mOhm @ 100kHz", Lifetime @ Temp.="2000 Hrs @ 125°C", Manufacturer=KEMET, Manufacturer Size Code=B, Operating Temperature="-55°C ~ 125°C", Package / Case="1411 (3528 Metric)", Ratings=COTS, Supplier Part Number 1=T540B226K010CH86107610-ND, Tolerance=±10%, Voltage - Rated=10V, Capacitance=22µF, ComponentLink1Description=Datasheet, ComponentLink1URL=https://api.kemet.com/component-edge/download/datasheet/T540B226K010CH86107610.pdf, ComponentLink2Description="DigiKey Link", ComponentLink2URL=http://digikey.com/product-detail/en/kemet/T540B226K010CH86107610/T540B226K010CH86107610-ND/6676110, Features="High Reliability", Height - Seated (Max)="0.083\" (2.10mm)", id=2514, LastUpdated=2020-08-30T20:56:14.177, Lifecycle Status=Active, Minimum Order=3600, Mounting Type="Surface Mount", Packaging=Bulk, Part Number=T540B226K010CH86107610, PartId=2514, Price=9.10, Series="KO-CAP® T540", Size / Dimension="0.138\" L x 0.110\" W (3.50mm x 2.80mm)", Supplier 1=DigiKey, Type=Molded
D1A: library part HSMG-C280, "LED GREEN DIFFUSED 0402 SMD", Current - Test=20mA, Device Package="0402 (1005 Metric)", Lens Color=White, Manufacturer="Broadcom Limited", Millicandela Rating=15mcd, Supplier Device Package=0402, Supplier Part Number 1=516-3066-1-ND, Voltage - Forward (Vf) (Typ)=2.2V, Color=Green, ComponentLink1Description=Datasheet, ComponentLink1URL=https://docs.broadcom.com/docs/AV02-0602EN, ComponentLink2Description="DigiKey Link", ComponentLink2URL=https://www.digikey.com/en/products/detail/broadcom-limited/HSMG-C280/1235358, Configuration=Standard, Height (Max)=0.40mm, id=697, LastUpdated=2023-01-02T20:56:26.750, Lens Size="1.00mm x 0.50mm", Lens Style="Rectangle with Flat Top", Lens Transparency=Diffused, Lifecycle Status=Active, Minimum Order=1, Mounting Type="Surface Mount", Package / Case="0402 (1005 Metric)", Packaging=TapeAndReel, Part Number=HSMG-C280, Part Status=Active, PartId=697, Price=0.08, Series=-, Size / Dimension="1.00mm L x 0.50mm W", Supplier 1=DigiKey, Viewing Angle=130°, Wavelength - Dominant=572nm, Wavelength - Peak=570nm
D1C: "Low-Capacitance ESD Protection USB", Manufacturer=STMicroelectronics, Distributor Link=https://www.mouser.de/ProductDetail/STMicroelectronics/USBLC6-2SC6?qs=po45yt2pPpu%2FhNIlwQdTlg%3D%3D, Manufacturer Part Number=USBLC6-2SC6
D2C: library part SM0402YC, "LED YELLOW CLEAR 0402 SMD", Current - Test=20mA, Device Package="0402 (1005 Metric)", Lens Color=Colorless, Manufacturer="Bivar Inc.", Millicandela Rating=145mcd, Supplier Device Package=0402, Supplier Part Number 1=492-2206-1-ND, Voltage - Forward (Vf) (Typ)=2V, Color=Yellow, ComponentLink1Description=Datasheet, ComponentLink1URL=https://www.bivar.com/Files/Datasheets/SM0402YC.pdf, ComponentLink2Description="DigiKey Link", ComponentLink2URL=https://www.digikey.com/en/products/detail/bivar-inc/SM0402YC/6810862, Configuration=0402, Height (Max)=0.71mm, id=170, LastUpdated=2023-01-02T20:57:30.187, Lens Size="0.50mm x 1.00mm", Lens Style="Rectangle with Flat Top", Lens Transparency=Clear, Lifecycle Status=Active, Minimum Order=1, Mounting Type="Surface Mount", Package / Case="0402 (1005 Metric)", Packaging=TapeAndReel, Part Number=SM0402YC, Part Status=Active, PartId=170, Price=0.16, Series=-, Size / Dimension="1.00mm L x 0.50mm W", Supplier 1=DigiKey, Viewing Angle=130°, Wavelength - Dominant=592nm, Wavelength - Peak=593nm
FB1C: library part BLM18KG121TZ1D, "FERRITE BEAD 120 OHM 0603 1LN", Current Rating (Max)=3A, DC Resistance (DCR) (Max)=30mOhm, Device Package="0603 (1608 Metric)", Manufacturer="Murata Electronics", Operating Temperature="-55°C ~ 125°C", Ratings=AEC-Q200, Supplier Part Number 1=490-16500-1-ND, ComponentLink1Description=Datasheet, ComponentLink1URL=https://www.murata.com/en-us/products/productdata/8796750610462/QNFA9122.pdf, ComponentLink2Description="DigiKey Link", ComponentLink2URL=https://www.digikey.com/en/products/detail/murata-electronics/BLM18KG121TZ1D/7363244, Filter Type="Power Line", Height (Max)="0.030\" (0.75mm)", id=635, Impedance @ Frequency="120 Ohms @ 100 MHz", LastUpdated=2023-01-02T20:51:43.247, Lifecycle Status=Active, Minimum Order=1, Mounting Type="Surface Mount", Number Of Lines=1, Package / Case="0603 (1608 Metric)", Packaging=TapeAndReel, Part Number=BLM18KG121TZ1D, Part Status=Active, PartId=635, Price=0.02, Series="EMIFIL®, BLM18", Size / Dimension="0.063\" L x 0.032\" W (1.60mm x 0.80mm)", Supplier 1=DigiKey
J1B J2B: "CONN HEADER VERT 20POS 2.54MM", Current Rating (Amps)=3A, Insulation Color=Black, Manufacturer="Sullins Connector Solutions", Material Flammability Rating="UL94 V-0", Operating Temperature="-40°C ~ 105°C", Supplier Part Number 1=SBH11-NBPC-D10-ST-BK-ND, ComponentLink1Description=Datasheet, ComponentLink1URL=https://s3.amazonaws.com/catalogspreads-pdf/PAGE122%20.100%20SBH11%20SERIES%20MALE%20BOX%20HDR%20ST%20RA%20SMT.pdf, ComponentLink2Description="DigiKey Link", ComponentLink2URL=http://digikey.com/product-detail/en/sullins-connector-solutions/SBH11-NBPC-D10-ST-BK/SBH11-NBPC-D10-ST-BK-ND/4558585, Connector Type=Header, Contact Finish - Mating=Gold, Contact Finish - Post=Gold, Contact Finish Thickness - Mating=Flash, Contact Material=Brass, Contact Shape=Square, Contact Type="Male Pin", Fastening Type=Push-Pull, Features="Keying Slot", id=135, Insulation Material="Polyamide (PA), Nylon", LastUpdated=2022-06-21T14:45:11.303, Lifecycle Status=Active, Minimum Order=1000, Mounting Type="Through Hole", Number Of Positions=20, Number Of Positions Loaded=All, Number Of Rows=2, Packaging=Tray, Part Number=SBH11-NBPC-D10-ST-BK, Part Status=Active, PartId=135, Price=0.40, Series=SBH11, Shrouding="Shrouded - 4 Wall", Style="Board to Board or Cable", Supplier 1=DigiKey, Termination=Solder
J1C: "USB Connector Type C SMT 12 Pin", Manufacturer=GCT, Distributor Link=https://eu.mouser.com/ProductDetail/GCT/USB4105-GF-A-060?qs=QNEnbhJQKvY2mocwNJzgfA%3D%3D, Manufacturer Part Number=USB4105-GF-A-060
R1A: library part AC0402JR-070RL, "RES SMD 0 OHM JUMPER 1/16W 0402", Device Package="0402 (1005 Metric)", Manufacturer=Yageo, Operating Temperature="-55°C ~ 155°C", Power (Watts)="0.063W, 1/16W", Ratings=AEC-Q200, Supplier Device Package=0402, Supplier Part Number 1=311-0.0LBCT-ND, Tolerance=Jumper, ComponentLink1Description=Datasheet, ComponentLink1URL=https://www.yageo.com/upload/media/product/productsearch/datasheet/rchip/PYu-AC_51_RoHS_L_7.pdf, ComponentLink2Description="DigiKey Link", ComponentLink2URL=https://www.digikey.com/en/products/detail/yageo/AC0402JR-070RL/2827807, Composition="Thick Film", Features="Automotive AEC-Q200, Moisture Resistant", Height - Seated (Max)="0.015\" (0.37mm)", id=9339, LastUpdated=2023-01-02T20:20:32.243, Lifecycle Status=Active, Minimum Order=1, Number Of Terminations=2, Package / Case="0402 (1005 Metric)", Packaging=CutTape, Part Number=AC0402JR-070RL, Part Status=Active, PartId=20617, Price=0.01, Resistance="0 Ohms", Series=AC, Size / Dimension="0.039\" L x 0.020\" W (1.00mm x 0.50mm)", Supplier 1=DigiKey
R1C: library part AC0402FR-071ML, "RES SMD 1M OHM 1% 1/16W 0402", Device Package="0402 (1005 Metric)", Manufacturer=Yageo, Operating Temperature="-55°C ~ 155°C", Power (Watts)="0.063W, 1/16W", Ratings=AEC-Q200, Supplier Device Package=0402, Supplier Part Number 1=YAG3450CT-ND, Temperature Coefficient=±100ppm/°C, Tolerance=±1%, ComponentLink1Description=Datasheet, ComponentLink1URL=https://www.yageo.com/upload/media/product/productsearch/datasheet/rchip/PYu-AC_51_RoHS_L_7.pdf, ComponentLink2Description="DigiKey Link", ComponentLink2URL=https://www.digikey.com/en/products/detail/yageo/AC0402FR-071ML/5895164, Composition="Thick Film", Features="Automotive AEC-Q200, Moisture Resistant", Height - Seated (Max)="0.015\" (0.37mm)", id=4991, LastUpdated=2023-01-02T20:21:09.883, Lifecycle Status=Active, Minimum Order=1, Number Of Terminations=2, Package / Case="0402 (1005 Metric)", Packaging=CutTape, Part Number=AC0402FR-071ML, Part Status=Active, PartId=12043, Price=0.01, Resistance="1 MOhms", Series=AC, Size / Dimension="0.039\" L x 0.020\" W (1.00mm x 0.50mm)", Supplier 1=DigiKey
R2A R3A: library part AC0402FR-074K7L, "RES SMD 4.7K OHM 1% 1/16W 0402", Device Package="0402 (1005 Metric)", Manufacturer=Yageo, Operating Temperature="-55°C ~ 155°C", Power (Watts)="0.063W, 1/16W", Ratings=AEC-Q200, Supplier Device Package=0402, Supplier Part Number 1=YAG3497CT-ND, Temperature Coefficient=±100ppm/°C, Tolerance=±1%, ComponentLink1Description=Datasheet, ComponentLink1URL=https://www.yageo.com/upload/media/product/productsearch/datasheet/rchip/PYu-AC_51_RoHS_L_7.pdf, ComponentLink2Description="DigiKey Link", ComponentLink2URL=https://www.digikey.com/en/products/detail/yageo/AC0402FR-074K7L/5895396, Composition="Thick Film", Features="Automotive AEC-Q200, Moisture Resistant", Height - Seated (Max)="0.015\" (0.37mm)", id=4996, LastUpdated=2023-01-02T20:21:09.847, Lifecycle Status=Active, Minimum Order=1, Number Of Terminations=2, Package / Case="0402 (1005 Metric)", Packaging=CutTape, Part Number=AC0402FR-074K7L, Part Status=Active, PartId=12051, Price=0.01, Resistance="4.7 kOhms", Series=AC, Size / Dimension="0.039\" L x 0.020\" W (1.00mm x 0.50mm)", Supplier 1=DigiKey
R2C R3C: library part AC0402FR-075K1L, "RES SMD 5.1K OHM 1% 1/16W 0402", Device Package="0402 (1005 Metric)", Manufacturer=Yageo, Operating Temperature="-55°C ~ 155°C", Power (Watts)="0.063W, 1/16W", Ratings=AEC-Q200, Supplier Device Package=0402, Supplier Part Number 1=YAG3503CT-ND, Temperature Coefficient=±100ppm/°C, Tolerance=±1%, ComponentLink1Description=Datasheet, ComponentLink1URL=https://www.yageo.com/upload/media/product/productsearch/datasheet/rchip/PYu-AC_51_RoHS_L_7.pdf, ComponentLink2Description="DigiKey Link", ComponentLink2URL=https://www.digikey.com/en/products/detail/yageo/AC0402FR-075K1L/5895438, Composition="Thick Film", Features="Automotive AEC-Q200, Moisture Resistant", Height - Seated (Max)="0.015\" (0.37mm)", id=5028, LastUpdated=2023-01-02T20:21:09.567, Lifecycle Status=Active, Minimum Order=1, Number Of Terminations=2, Package / Case="0402 (1005 Metric)", Packaging=CutTape, Part Number=AC0402FR-075K1L, Part Status=Active, PartId=12111, Price=0.01, Resistance="5.1 kOhms", Series=AC, Size / Dimension="0.039\" L x 0.020\" W (1.00mm x 0.50mm)", Supplier 1=DigiKey
R4A R5A R8A: library part AA0402FR-0710KL, "RES SMD 10K OHM 1% 1/16W 0402", Device Package="0402 (1005 Metric)", Manufacturer=Yageo, Operating Temperature="-55°C ~ 155°C", Power (Watts)="0.063W, 1/16W", Ratings=AEC-Q200, Supplier Device Package=0402, Supplier Part Number 1=13-AA0402FR-0710KLCT-ND, Temperature Coefficient=±150ppm/°C, Tolerance=±1%, ComponentLink1Description=Datasheet, ComponentLink1URL=https://www.yageo.com/upload/media/product/productsearch/datasheet/rchip/PYu-AA_51_RoHS_L_3.pdf, ComponentLink2Description="DigiKey Link", ComponentLink2URL=https://www.digikey.com/en/products/detail/yageo/AA0402FR-0710KL/5887729, Composition="Thick Film", Features="Anti-Sulfur, Automotive AEC-Q200, Moisture Resistant", Height - Seated (Max)="0.015\" (0.37mm)", id=10610, LastUpdated=2023-01-02T20:20:10.303, Lifecycle Status=Active, Minimum Order=1, Number Of Terminations=2, Package / Case="0402 (1005 Metric)", Packaging=TapeAndReel, Part Number=AA0402FR-0710KL, Part Status=Active, PartId=59190, Price=0.01, Resistance="10 kOhms", Series=AA, Size / Dimension="0.039\" L x 0.020\" W (1.00mm x 0.50mm)", Supplier 1=DigiKey
R4C R6A R7A: library part AA0402FR-071KL, "RES SMD 1K OHM 1% 1/16W 0402", Device Package="0402 (1005 Metric)", Manufacturer=Yageo, Operating Temperature="-55°C ~ 155°C", Power (Watts)="0.063W, 1/16W", Ratings=AEC-Q200, Supplier Device Package=0402, Supplier Part Number 1=13-AA0402FR-071KLCT-ND, Temperature Coefficient=±150ppm/°C, Tolerance=±1%, ComponentLink1Description=Datasheet, ComponentLink1URL=https://www.yageo.com/upload/media/product/productsearch/datasheet/rchip/PYu-AA_51_RoHS_L_3.pdf, ComponentLink2Description="DigiKey Link", ComponentLink2URL=https://www.digikey.com/en/products/detail/yageo/AA0402FR-071KL/5887878, Composition="Thick Film", Features="Anti-Sulfur, Automotive AEC-Q200, Moisture Resistant", Height - Seated (Max)="0.015\" (0.37mm)", id=10598, LastUpdated=2023-01-02T20:20:10.210, Lifecycle Status=Active, Minimum Order=1, Number Of Terminations=2, Package / Case="0402 (1005 Metric)", Packaging=TapeAndReel, Part Number=AA0402FR-071KL, Part Status=Active, PartId=59178, Price=0.01, Resistance="1 kOhms", Series=AA, Size / Dimension="0.039\" L x 0.020\" W (1.00mm x 0.50mm)", Supplier 1=DigiKey
S1A: "SWITCH ROTARY DIP SP3T 100MA 16V", Current Rating (Amps)=100mA, Manufacturer="Nidec Copal Electronics", Operating Temperature="-25°C ~ 70°C", Supplier Part Number 1=563-1035-1-ND, Actuator Level="Flush, Recessed", Actuator Type="Rotary for Tool", Circuit=SP3T, ComponentLink1Description=Datasheet, ComponentLink1URL=https://www.nidec-copal-electronics.com/e/catalog/switch/cs-4.pdf, ComponentLink2Description="DigiKey Link", ComponentLink2URL=https://www.digikey.com/en/products/detail/nidec-copal-electronics/CS-4-13NTA/948346, Contact Finish=Gold, Contact Material="Copper Alloy", Height Above Board="0.091\" (2.30mm)", id=6, LastUpdated=2022-09-26T03:19:43.077, Lifecycle Status=Active, Minimum Order=1, Mounting Type="Surface Mount", Number Of Positions=3, Packaging=TapeAndReel, Part Number=CS-4-13NTA, Part Status=Active, PartId=13, Pitch="0.051\" (1.30mm)", Price=0.93, Series=CS-4, Supplier 1=DigiKey, Termination Style="J Lead", Washable=Yes
S2A: "3.0MM X 2.0MM / 3.3N / 0.15MM ST", Contact Rating @ Voltage="0.02A @ 15VDC", Manufacturer="Panasonic Electronic Components", Operating Force=330gf, Operating Temperature="-40°C ~ 85°C", Supplier Part Number 1=P123440CT-ND, Actuator Height Off Pcb, Vertical=0.60mm, Actuator Orientation="Top Actuated", Actuator Type=Standard, Circuit=SPST-NO, ComponentLink1Description=Datasheet, ComponentLink1URL=https://industrial.panasonic.com/ac/cdn/e/control/switch/light-touch/catalog/sw_lt_eng_3020s.pdf, ComponentLink2Description="DigiKey Link", ComponentLink2URL=https://www.digikey.com/en/products/detail/panasonic-electronic-components/EVP-AWED4A/8568275, id=5, Illumination=Non-Illuminated, Ingress Protection="IP67 - Dust Tight, Waterproof", LastUpdated=2023-01-02T21:07:29.980, Lifecycle Status=Active, Minimum Order=1, Mounting Type="Surface Mount", Outline="3.00mm x 2.00mm", Packaging=TapeAndReel, Part Number=EVP-AWED4A, Part Status=Active, Price=0.16, Series=EVPAW, Supplier 1=DigiKey, Switch Function=Off-Mom, Termination Style="SMD (SMT) Tab"
U1A: library part CMP-0243-00165-1, "ARM Cortex-M4 32-bit MCU+FPU, 512 KB Flash, 128 KB RAM, 36 I/Os, 48-Pin UFQFPN, -40 to 85 degC, Tray", I/Os (High Current)=36, Operating Frequency(F) (Processor speed) (MHz)=100, Package Description=UFQFPN48, Package Reference="48-Pin Ultra Thin Fine Pitch Quad Flat No-Lead, 7 x 7 x 0.6 mm Body, 0.5 mm Pitch, Exposed Pad", Supply Voltage(Vcc) min (V)=1.7, ComponentLink1Description="Manufacturer URL", ComponentLink1URL=http://www.st.com/, ComponentLink2Description=Datasheet, ComponentLink2URL=http://www.st.com/st-web-ui/static/active/en/resource/technical/document/datasheet/DM00115249.pdf, Core="ARM Cortex-M4", DatasheetVersion="Rev. 6", FLASH Size (Prog) (kB)=512, Internal RAM Size (kB)=128, Mounting Technology="Surface Mount", Packing=Tray
U1B: "MPU-6050 series Accelerometer, Gyroscope, 3 Axis Sensor Evaluation Board", Package="QFN-24 InvenSense", Supplier Part Number 1=1428-1007-1-ND, Check_prices=https://www.snapeda.com/parts/MPU-6050/TDK+InvenSense/view-part/?ref=eda, MF="TDK InvenSense", MP=MPU-6050, SnapEDA_Link=https://www.snapeda.com/parts/MPU-6050/TDK+InvenSense/view-part/?ref=snap, Supplier 1=Digikey
U1C: library part CMP-209535-000001-1, "LDO Voltage Regulators 1A, 3.3V", Dropout Voltage=1.1V, Manufacturer="Advanced Monolithic Systems", Max Junction Temp=+125°C, Max Power Dissipation=1.2W, Max Supply Voltage=15V, Nominal Supply Current=5mA, Output Current=1A, Output Voltage=3.3V, Package=AMS1117, Temperature="-40°C to +125°C", Temperature Range Low=-40°C, Automotive=No, Category=IC, ComponentLink2Description=Datasheet, ComponentLink2URL=http://www.advanced-monolithic.com/pdf/ds1117.pdf, Device Class L1="Integrated Circuits (ICs)", Device Class L2="Power Management ICs", Device Class L3="Voltage Regulators - Linear", Height=1.8mm, Ipc Land Pattern Name=SOT229P700X180-4, Lead Free=Yes, Manufacturer Part Number=AMS1117-3.3, Number Of Outputs=1, Octopart=https://octopart.com/ams1117-3.3-advanced+monolithic+systems-25899300, Output Type=Fixed, RoHS=TRUE, Standoff Height=0.64mm, Temperature Range High=+125°C
Y1A: library part "TSX-3225 24.0000MF15X-AC3", "CRYSTAL 24.0000MHZ 9PF SMD", Esr (Equivalent Series Resistance)="40 Ohms", Frequency Stability=±15ppm, Frequency Tolerance=±10ppm, Load Capacitance=9pF, Manufacturer=EPSON, Operating Mode=Fundamental, Operating Temperature="-40°C ~ 85°C", Package / Case="4-SMD, No Lead", Supplier Part Number 1=SER3635CT-ND, ComponentLink1Description=Datasheet, ComponentLink1URL=https://support.epson.biz/td/api/doc_check.php?dl=brief_TSX-3225&lang=en, ComponentLink2Description="DigiKey Link", ComponentLink2URL=https://www.digikey.com/en/products/detail/epson/TSX-3225-24-0000MF15X-AC3/1825444, Frequency="24 MHz", Height - Seated (Max)="0.024\" (0.60mm)", id=441, LastUpdated=2023-01-02T20:58:19.840, Lifecycle Status=Active, Minimum Order=1, Mounting Type="Surface Mount", Packaging=TapeAndReel, Part Number="TSX-3225 24.0000MF15X-AC3", Part Status=Active, PartId=441, Price=0.44, Series=TSX-3225, Size / Dimension="0.126\" L x 0.098\" W (3.20mm x 2.50mm)", Supplier 1=DigiKey, Type="MHz Crystal"

## Free pads (board coordinates)
  round 1 hole 0.5: 37(16.95,35.35)
  round 2.5 hole 2 unplated: MH(2.5,47.5) MH(8,12) MH(20.5,12) MH(32.5,47.5)

## Via types
v1: diameter 0.5, hole 0.2, Top Layer to Bottom Layer, 203 vias
v2: diameter 0.45, hole 0.2, Top Layer to Bottom Layer, 1 vias

## Nets (pads, with @x,y where several pads share a name; then routed paths per layer and width w, separated by ;. In a path a pad name is that pad's centre, name@x,y a point inside that pad or via, vN(x,y) a via of type N, cw(c..) or ccw(c..) an arc to the next point about the centre after c; other vN are vias at no path point)
+3V3: C1B.2 C3A.2 C3B.2 C4A.2 C5A.2 C5C.1 C6A.2 C7A.2 C8A.2 D2C.1 J1B.5 J1B.16 J2B.5 J2B.16 R2A.2 R3A.2 R4A.2 R8A.1 U1A.1 U1A.9 U1A.24 U1A.36 U1A.48 U1B.8 U1B.13 U1C.2 U1C.4 | length 27.8
  Top Layer w0.3: C8A.2 9.765,15.79 10.34,15.964 ; 10.341,15.965 cw(c10.427,15.677) 10.411,15.977 U1A.9 ; U1A.24 17.7,13.85 v1(18.027,13.523) C4A.2
  Top Layer w0.305: 13.9,28.5 U1B.8 ; 15.5,25 U1B.13 ; U1A.36 17.65,20.521 17.829,20.7
  Top Layer w0.4: 17.829,20.7 18.79,20.7 C5A.2 19.555,20.615 19.831,20.891 19.831,20.931 v1(19.85,20.95)
  Top Layer w0.5: v1(3.75,30) R8A.1 ; v1(7.45,15.79) C8A.2 ; v1@13.04,29.36 C3B.2 13.9,28.5 ; v1(15.2,24.225) 15.225,24.25 15.85,24.25 ; 15.5,25 15.5,24.6 15.85,24.25 ; C1B.2 15.85,24.25 ; R3A.2 v1(20.2,31.825) ; v1(21.1,25.9) R2A.2
  Top Layer w0.6: R4A.2 v1(3,28.9) ; v1(24.5,42) 24.5,45.5 25,46 28.25,46 29.025,46.775 D2C.1
  other v1: 9.1,21.5 9.8,21.5 9.1,22.2 9.8,22.2 13.037,29.357 24.5,34.5 24.5,35.25 24.5,36 24.5,36.75 23,37.5 23.75,37.5 24.5,37.5 23,38.25 23.75,38.25 24.5,38.25 23,39 23.75,39 24.5,39 24.5,39.75 24.5,40.5 24.5,41.25
+5V: C3C.1 C4C.2 FB1C.2 J1B.1 J1B.10 J2B.1 J2B.10 U1C.3 | length 120.8
  Top Layer w0.6: FB1C.2 5.64,36.785 C4C.2
  Mid Layer 1 w1.5: 6,33.8 7.5,33.8 12.3,33.8 ; 12.4,33.8 16.658,38.058 16.658,47.333 16.658,48.067 16.658,48.558
  Bottom Layer w1.5: J1B.1 6.166,3.634 6.166,2.034 7.025,1.175 27.956,1.175 28.834,2.054 28.834,3.634 J1B.10 31.026,3.73 31.905,4.609 31.905,13.695 31.325,14.275 ; 16.6,47 16.65,46.95 18.55,45.05 26.65,45.05 28.73,42.97 ; J2B.10 28.78,17.02 28.78,15.154 29.659,14.275 31.325,14.275 ; J2B.1 28.73,42.97 ; 28.73,42.97 32.28,42.97 33.6,41.65 33.6,15.154 32.721,14.275 31.325,14.275
  other v1: 5.9,33.5 6.7,33.5 7.5,33.5 5.9,34.2 6.7,34.2 7.5,34.2 16.3,46.6 17,46.6 16.3,47.333 17,47.333 16.3,48.067 17,48.067 16.3,48.8 17,48.8
BOOT_SELECT: S1A.C U1A.44 | length 9.8
  Top Layer w0.305: U1A.44 13.5,24.65 v1(14.15,25.3)
  Top Layer w1: S1A.C v1(10.65,25.25)
  Mid Layer 1 w0.4: v1@14.073,25.25 14.123,25.3 v1(14.15,25.3)
  Bottom Layer w0.4: v1(10.65,25.25) v1@14.073,25.25
CC1: J1C.A5 R3C.2 | length 4.5
  Top Layer w0.3: J1C.A5 11.45,41.75 12.8,40.4 R3C.2
CC2: J1C.B5 R2C.2 | length 4.3
  Top Layer w0.3: R2C.2 7.598,39.798 8.45,40.65 J1C.B5
CPOUT: C4B.2 U1B.20 | length 2.6
  Top Layer w0.305: U1B.20 19.6,27 20,26.6 C4B.2
GND: C1A.1 C1B.1 C1C.2 C2A.1 C2B.1 C2C.1 C3A.1 C3B.1 C3C.2 C4A.1 C4B.1 C4C.1 C5A.1 C5C.2 C6A.1 C7A.1 C8A.1 C9A.1 C10A.1 D1C.2 J1B.6 J1B.11 J1B.15 J1B.20 J1C.A1B12 J1C.B1A12 J2B.6 J2B.11 J2B.15 J2B.20 pad.37 R1C.2 R2C.1 R3C.1 R4C.1 R5A.1 R6A.1 R7A.1 U1A.8 U1A.23 U1A.35 U1A.47 U1A.49 U1B.1 U1B.9 U1B.11 U1B.18 U1B.25 U1C.1 Y1A.2 Y1A.4 | length 53.2
  Top Layer w0.305: U1A.8 13.5,16.5 v1(14.25,17.25) ; v1(12.05,19.45) 12,19.5 U1A.47 12,21.4 12.13,21.53 C7A.1 ; U1B.11 16.03,27 v1(16.2,27.17) ; U1B.9 15.93,28 v1(16.2,28.27) ; v1(16.45,15.05) 16.5,15 U1A.23 ; v1(16.45,19.45) 16.5,19.5 U1A.35 18.62,19.5 18.855,19.735 C5A.1 ; 18,25.1 U1B.18 ; U1B.1 v1(18,30.7)
  Top Layer w0.4: Y1A.2 3.825,16.125 4.45,16.75 4.45,16.95 4.8,17.3 4.8,17.45 5.425,18.075 Y1A.4
  Top Layer w0.5: v1(3.5,39.8) C2C.1 ; v1(3.8,35.2) C4C.1 ; Y1A.2 3.757,15.932 3.757,14.85 3.45,14.543 3.45,14.043 3.743,13.75 C2A.1 ; C10A.1 6.891,29.3 v1(6.894,29.303) 6.896,29.3 R7A.1 ; v1(7.535,14.91) C8A.1 ; v1(7.598,36.502) R2C.1 ; v1(11.3,27.1) C2B.1 C3B.1 v1(11.3,28.5) ; v1(12.8,36.5) R3C.1 ; C1B.1 17.65,24.25 18,24.6 ; 18,25.1 18,24.6 ; C5A.1 v1(19.865,19.735) ; C4B.1 v1(19.03,24.57) 18.03,24.57 18,24.6
  Top Layer w0.508: v1(10.2,36.625) D1C.2
  Top Layer w0.6: v1(2.75,20.25) C1A.1 ; v1(3,21.6) R5A.1 ; C1C.2 4.2,41.5 4.7,41 ; v1(7.2,21.08) 8.033,20.247 C3A.1 8.033,20.207 8.01,20.184 C6A.1 ; 13.9,41 15.7,41 16.2,41.5 R1C.2 ; 23.724,13.85 23.874,13.7 24.075,13.7 R6A.1
  Top Layer w0.7: C9A.1 18.017,11.65 C4A.1 v1(18.027,10.777)
  Top Layer w1: v1(2.3,16) Y1A.2
  Top Layer w1.8: pad.37 C5C.2
  other v1: 3,1 5,1 31,1 33,1 2,3 4,3 34,3 1,5 3,5 5,5 15,5 2,7 4,7 34,7 1,9 3,9 5,9 7,9 27,9 29,9 2,11 4,11 6,11 24,11 26,11 28,11 30,11 34,11 1,13 3,13 2,15 26,15 12.05,15.05 13.15,15.05 14.25,15.05 15.35,15.05 12.05,16.15 13.15,16.15 14.25,16.15 15.35,16.15 16.45,16.15 1,17 12.05,17.25 13.15,17.25 15.35,17.25 16.45,17.25 12.05,18.35 13.15,18.35 14.25,18.35 15.35,18.35 16.45,18.35 2,19 24,19 13.15,19.45 14.25,19.45 15.35,19.45 1,21 21,21 2,23 4,23 6,23 18.275,24.575 1,25 3,25 7,25 2,27 8,27 10,27 22,27 17.3,27.17 17.3,28.27 1,29 27,29 2,31 10,31 12,31 14,31 16,31 1,33 3,33 15.4,33.5 16.6,34 2,35 16,35 1,37 3,37 27,37 2,39 4,39 14,39 1,41 3,41 5,41 15,41 27,41 6.65,41.5 10.2,41.5 13.625,41.7 2,43 1,45 3,45 7,45 29,45 31,45 33,45 24,47 26,47 28,47 30,47 22.1,49.3 23.125,49.3 24.15,49.3 25.175,49.3 26.2,49.3 27.225,49.3 28.25,49.3 29.275,49.3 30.3,49.3
GNDS: C1C.1 J1C.SH R1C.1 | length 23.5
  Top Layer w0.6: C1C.1 4.2,44.936 4.551,45.287 5.88,45.287 ; 14.52,45.287 15.813,45.287 16.2,44.9 R1C.1
  Top Layer w1: J1C.SH@5.88,43.197 5.88,45.287 5.88,47.377 14.52,47.377 14.52,45.287 J1C.SH@14.52,43.197
IMU_INT: U1A.45 U1B.12 | length 7.1
  Top Layer w0.305: U1A.45 13,25.6 13.9,26.5 U1B.12
IMU_REGOUT: C2B.2 U1B.10 | length 1.9
  Top Layer w0.305: C2B.2 13.7,27.1 14.1,27.5 U1B.10
IMU_SCL: R2A.1 U1A.42 U1B.23 | length 12.8
  Top Layer w0.3: U1A.42 14.5,22.725 v1(14.725,22.95)
  Top Layer w0.305: U1B.23 19.389,28.5 19.863,28.027 19.863,27.737 v1(19.9,27.7)
  Top Layer w0.4: v1(19.9,27.7) 19.927,27.7 20.127,27.9 21,27.9 21.1,28 R2A.1
  Mid Layer 1 w0.3: v1@19.862,27.662 v1(19.9,27.7)
  Bottom Layer w0.3: v1(14.725,22.95) 15.575,22.95 19.862,27.237 v1@19.862,27.662
IMU_SDA: R3A.1 U1A.43 U1B.24 | length 14.5
  Top Layer w0.3: U1B.24 19.946,29 20.146,28.8 v1(20.2,28.8)
  Top Layer w0.305: U1A.43 14,23.309 14.35,23.659 v1(14.35,23.7)
  Top Layer w0.4: v1(20.2,28.8) R3A.1
  Mid Layer 1 w0.305: v1@20.163,28.763 v1(20.2,28.8)
  Bottom Layer w0.305: v1(14.35,23.7) 14.36,23.71 14.36,24.56 14.75,24.95 16.7,24.95 19.2,27.45 19.2,28.1 19.863,28.763 v1@20.163,28.763
LED_STATUS: D1A.1 U1A.26 | length 5.7
  Top Layer w0.3: U1A.26 18.35,15 19.1,14.25 21.425,14.25 22.15,13.525 D1A.1
MCU_OSC_IN: C1A.2 U1A.5 Y1A.1 | length 10.3
  Top Layer w0.305: C1A.2 6.45,20.25 6.9,19.8 6.9,18.5 7.3,18.1 9.8,18.1 9.9,18 U1A.5
  Top Layer w0.4: Y1A.1 3.9,18.275 3.9,19.1 4.1,19.3 4.6,19.3 5.055,19.755 C1A.2
MCU_OSC_OUT: R1A.2 U1A.6 | length 2.1
  Top Layer w0.305: R1A.2 9.8,17.2 10.1,17.5 U1A.6
MCU_PA0: J1B.2 U1A.10 | length 14.3
  Top Layer w0.3: J1B.2 7.35,4.99 7.35,8.3 9.85,10.8 9.85,12.85 9.55,13.15 9.55,14.8 10.25,15.5 U1A.10
MCU_PA1: J1B.19 U1A.11 | length 10.2
  Top Layer w0.3: J1B.19 8.61,8.61 10.375,10.375 10.375,13.1 10.05,13.425 10.05,14.724 10.326,15 U1A.11
MCU_PA2: J1B.3 U1A.12 | length 11.7
  Top Layer w0.3: U1A.12 10.85,9.4 9.875,8.425 9.875,5.005 J1B.3
MCU_PA3: J1B.18 U1A.13 | length 7.7
  Top Layer w0.3: J1B.18 11.15,8.175 11.5,8.525 U1A.13
MCU_PA4: J1B.4 U1A.14 | length 10.8
  Top Layer w0.3: U1A.14 12,9.025 12.425,8.6 12.425,4.995 J1B.4
MCU_PA5: J1B.17 U1A.15 | length 8.1
  Top Layer w0.3: U1A.15 12.5,12.175 13,11.675 13,9.05 13.69,8.36 J1B.17
MCU_PA6: J1B.7 U1A.16 | length 15.8
  Top Layer w0.3: U1A.16 13,12.375 13.475,11.9 13.475,9.975 15.775,7.675 19.55,7.675 20.025,7.2 20.025,5.015 J1B.7
MCU_PA7: J1B.14 U1A.17 | length 13.6
  Top Layer w0.3: U1A.17 13.5,12.475 13.975,12 13.975,10.175 16.05,8.1 20.8,8.1 21.31,7.59 J1B.14
MCU_PA8: J2B.8 U1A.29 | length 15.5
  Top Layer w0.3: U1A.29 18.95,16.5 19.8,15.65 21.225,15.65 22.3,16.725 24.275,16.725 24.3,16.7 26.4,18.8 26.4,21.1 27.45,22.15 J2B.8
MCU_PA9: J2B.14 U1A.30 | length 19.2
  Top Layer w0.3: U1A.30 19.2,17 20.025,16.175 21.15,16.175 22.125,17.15 24.05,17.15 25.8,18.9 25.8,21.9 27.3,23.4 29.98,23.4 J2B.14
MCU_PA10: J2B.7 U1A.31 | length 16.7
  Top Layer w0.3: U1A.31 19.275,17.5 20.175,16.6 20.95,16.6 21.975,17.625 23.725,17.625 25.2,19.1 25.2,22.3 27.46,24.56 28.6,24.56 J2B.7
MCU_PA13: J2B.19 U1A.34 | length 31.7
  Top Layer w0.3: U1A.34 21.8,19 24.1,21.3 24.1,22.3 26.975,25.175 26.975,28.025 27.45,28.5 32.825,28.5 33.025,28.7 33.025,36.8 32.54,37.285 31.375,37.285 J2B.19
MCU_PA14: J2B.17 U1A.37 | length 21.8
  Top Layer w0.3: U1A.37 17,21.124 17.176,21.3 18.1,21.3 18.55,21.75 22.275,21.75 25.975,25.45 25.975,29.555 27.47,31.05 30.01,31.05 J2B.17
MCU_PA15: J2B.4 U1A.38 | length 20.1
  Top Layer w0.3: U1A.38 16.5,21.3 17,21.8 17.9,21.8 18.3,22.2 21.975,22.2 25.55,25.775 25.55,30.3 27.46,32.21 28.63,32.21 J2B.4
MCU_PB0: J1B.8 U1A.18 | length 17.7
  Top Layer w0.3: U1A.18 14,12.55 14.45,12.1 14.45,10.325 16.25,8.525 22.25,8.525 22.6,8.175 22.6,4.98 J1B.8
MCU_PB1: J1B.13 U1A.19 | length 15.4
  Top Layer w0.3: U1A.19 14.5,12.725 14.9,12.325 14.9,10.55 16.5,8.95 23.175,8.95 23.85,8.275 J1B.13
MCU_PB2: J1B.9 U1A.20 | length 19.2
  Top Layer w0.3: U1A.20 15,12.85 15.35,12.5 15.35,10.8 16.725,9.425 24.125,9.425 25.125,8.425 25.125,4.995 J1B.9
MCU_PB3: J2B.18 U1A.39 | length 24.7
  Top Layer w0.3: U1A.39 16,21.6 16.7,22.3 17.7,22.3 18.075,22.675 21.875,22.675 25.05,25.85 25.05,30.925 27.7,33.575 29.995,33.575 J2B.18
MCU_PB4: J2B.3 U1A.40 | length 23
  Top Layer w0.3: U1A.40 15.5,21.775 16.525,22.8 17.525,22.8 17.825,23.1 21.6,23.1 24.6,26.1 24.6,31.175 28.275,34.85 J2B.3 J2B.3@28.73,34.58
MCU_PB5: J2B.2 U1A.41 | length 25.3
  Top Layer w0.3: U1A.41 15,22.1 16.275,23.375 17.4,23.375 17.575,23.55 21.4,23.55 24.15,26.3 24.15,31.4 26.825,34.075 26.825,35.485 J2B.2
MCU_PB10: J1B.12 U1A.21 | length 16.5
  Top Layer w0.3: U1A.21 15.5,13.05 15.9,12.65 15.9,11.05 16.95,10 24.5,10 26.39,8.11 J1B.12
MCU_PB12: J2B.12 U1A.25 | length 24.3
  Top Layer w0.3: U1A.25 17.875,14.5 18.198,14.177 18.434,14.177 18.861,13.75 21.25,13.75 22.5,12.5 31.75,12.5 33.1,13.85 33.1,19.4 32.89,19.61 J2B.12
MCU_PB14: J2B.9 U1A.27 | length 13.4
  Top Layer w0.3: U1A.27 18.525,15.5 19.3,14.725 21.65,14.725 22.675,15.75 24.87,15.75 J2B.9
MCU_PB15: J2B.13 U1A.28 | length 17.7
  Top Layer w0.3: U1A.28 18.775,16 19.575,15.2 21.425,15.2 22.475,16.25 24.5,16.25 27,18.75 27,20.3 27.577,20.877 29.997,20.877 J2B.13
MCU_RESET: C10A.2 R8A.2 S2A.1 U1A.7 | length 20.6
  Top Layer w0.305: v2(9.778,16.469) 10.309,17 U1A.7
  Top Layer w0.5: v1(5.1,28.35) 5.095,28.355 C10A.2 5.095,29.895 5.375,30.175 S2A.1
  Top Layer w0.6: R8A.2 5.35,32.15 5.375,32.125 S2A.1
  Mid Layer 1 w0.5: v1(5.1,28.35) 5.1,28.25 8.225,25.125 8.225,18.075 v2@9.8,16.5
MCU_VCAP: C9A.2 U1A.22 | length 1.7
  Top Layer w0.3: U1A.22 16,13.285 16.755,12.53 C9A.2
  Top Layer w0.305: C9A.2 C9A.2
NetC2A_2: C2A.2 R1A.1 Y1A.3 | length 5.2
  Top Layer w0.5: C2A.2 5.315,13.8 5.315,15.89 Y1A.3 5.425,16.125 6.5,17.2 R1A.1
NetD1A_2: D1A.2 R6A.2 | length 1.4
  Top Layer w0.5: D1A.2 24.025,14.675 24.075,14.725 R6A.2
NetD2C_2: D2C.2 R4C.2 | length 2.1
  Top Layer w0.5: R4C.2 D2C.2
NetR4A_1: R4A.1 S1A.1 | length 1.8
  Top Layer w0.6: R4A.1 3,26.6 3.05,26.55 S1A.1
NetR5A_2: R5A.2 S1A.3 | length 1.8